# Altium PCB Power_Board_DRV8323.PcbDoc
Units mil, origin at the board's own origin, x right, y up, seen from the top; angles counter-clockwise.
Board outline 6000 x 4000 mil, 2 copper layers (Top Layer, Bottom Layer); 41 components, 45 nets, 170 pads, 22 vias.
Unrouted connection lines stored in the file: 33.
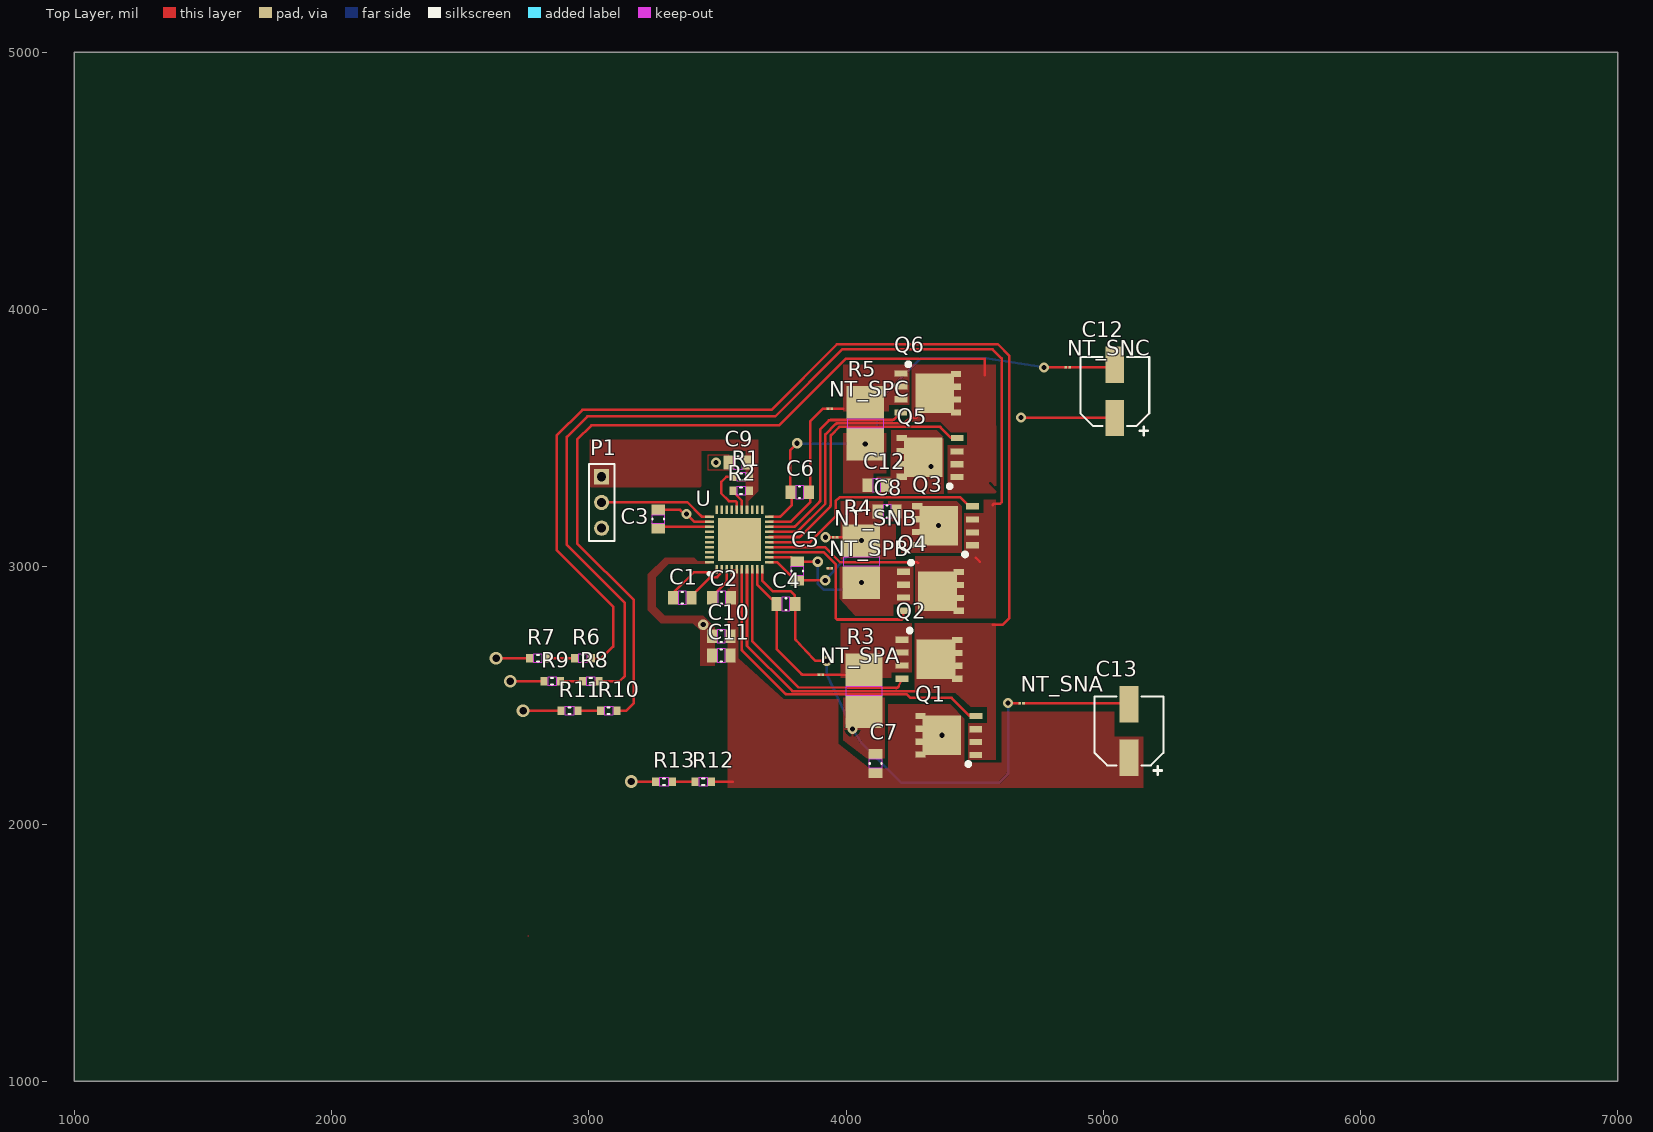
[diagram p0: Top Layer view]
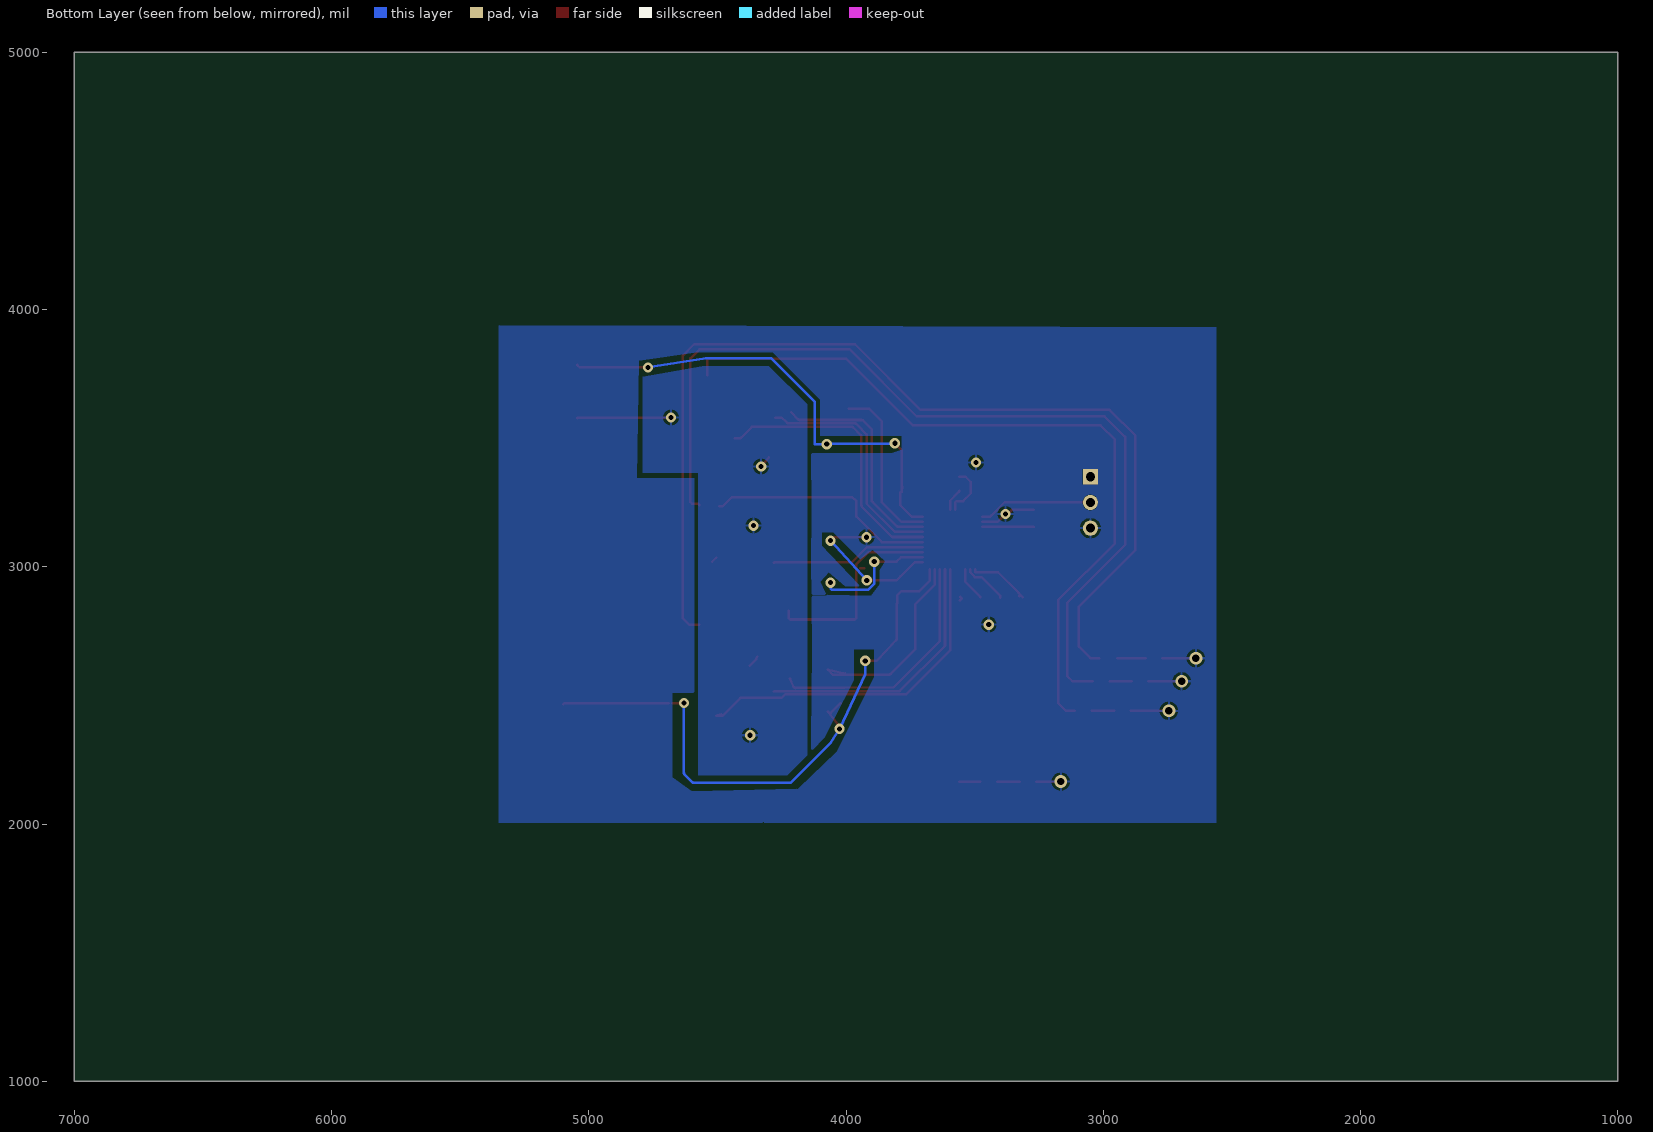
[diagram p1: Bottom Layer view, seen from below]
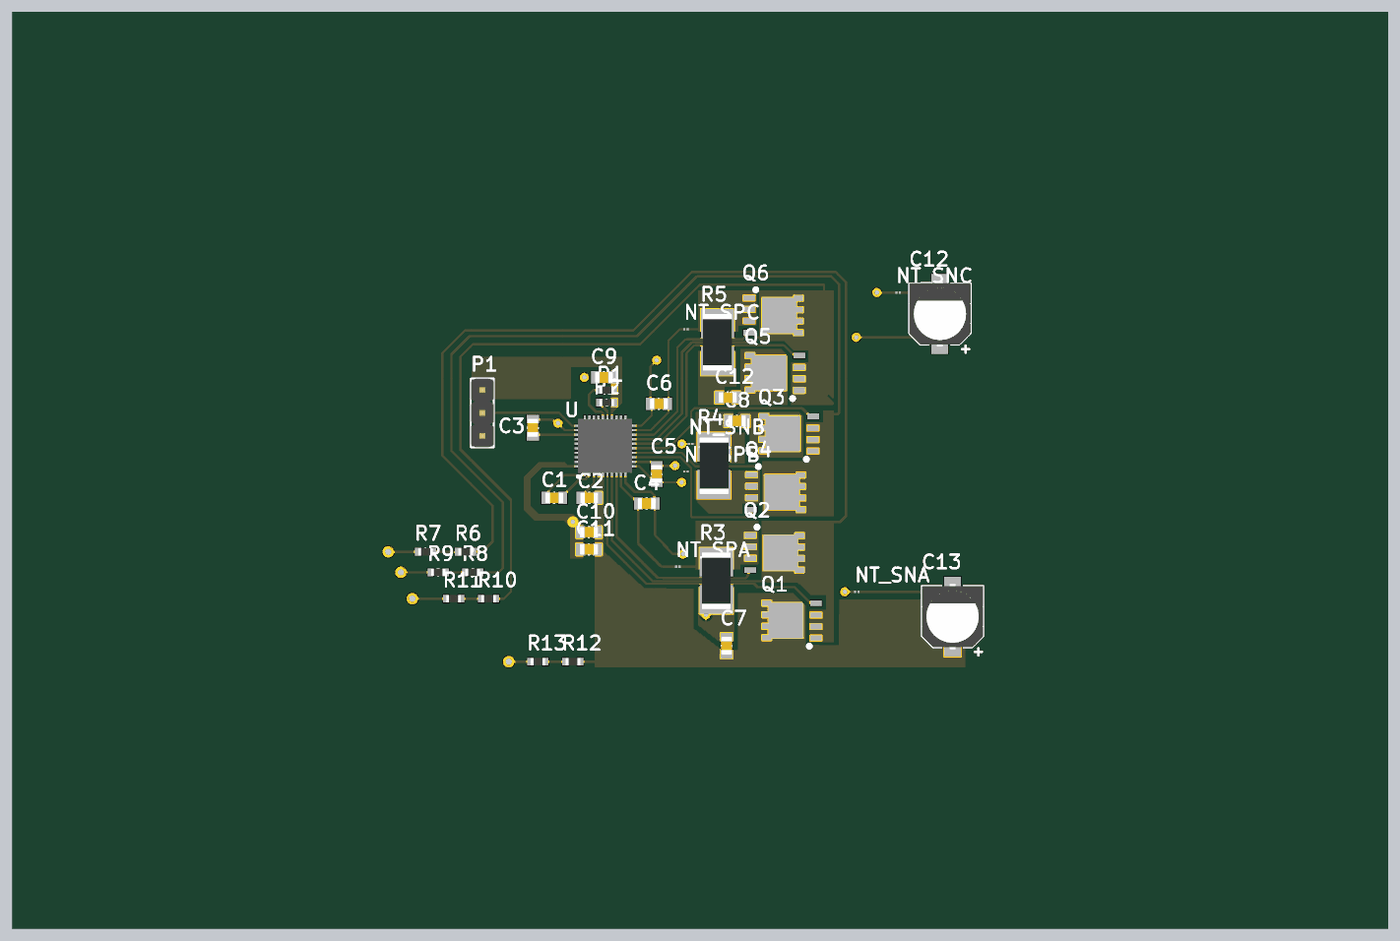
[diagram p2: 3D render of the assembled board from above, using the file's embedded part models]

## Layer stack, top to bottom
Top Solder: solder mask 0.4, Solder Resist, Dk 3.5
Top Layer: signal copper 1.4
Dielectric 1: dielectric 12.6, FR-4, Dk 4.8
Bottom Layer: signal copper 1.4
Bottom Solder: solder mask 0.4, Solder Resist, Dk 3.5

## Board outline
1000,1000 7000,1000 7000,5000 1000,5000

## Design rules (kind name [scope] priority, off if disabled: settings)
Clearance [All] p1 off: gap=10 ignorepadtopadclearanceinfootprint=FALSE except(0: Arc-Hole Track-Hole SMDPad-Hole THPad-Hole Via-Hole Fill-Hole Poly-Hole Region-Hole Text-Hole)
PolygonConnect PolygonConnect_48 [All vs IsNamedPolygon('GND_L01_P007')] p1: thpad.connectstyle=Direct thpad.reliefconductorwidth=10 thpad.reliefentries=4 thpad.polygonreliefangle="90 Angle" thpad.airgapwidth=10 smdpad.connectstyle=Direct smdpad.reliefconductorwidth=10 smdpad.reliefentries=4 smdpad.polygonreliefangle="90 Angle" smdpad.airgapwidth=10 via.connectstyle=Relief via.reliefconductorwidth=10 via.reliefentries=4 via.polygonreliefangle="90 Angle" via.airgapwidth=10
PolygonConnect PolygonConnect_47 [All vs IsNamedPolygon('GND_L01_P007')] p2: thpad.connectstyle=Direct thpad.reliefconductorwidth=10 thpad.reliefentries=4 thpad.polygonreliefangle="90 Angle" thpad.airgapwidth=10 smdpad.connectstyle=Direct smdpad.reliefconductorwidth=10 smdpad.reliefentries=4 smdpad.polygonreliefangle="90 Angle" smdpad.airgapwidth=10 via.connectstyle=Relief via.reliefconductorwidth=10 via.reliefentries=4 via.polygonreliefangle="90 Angle" via.airgapwidth=10
PolygonConnect PolygonConnect_46 [All vs IsNamedPolygon('GND_L01_P007')] p3: thpad.connectstyle=Direct thpad.reliefconductorwidth=10 thpad.reliefentries=4 thpad.polygonreliefangle="90 Angle" thpad.airgapwidth=10 smdpad.connectstyle=Direct smdpad.reliefconductorwidth=10 smdpad.reliefentries=4 smdpad.polygonreliefangle="90 Angle" smdpad.airgapwidth=10 via.connectstyle=Relief via.reliefconductorwidth=10 via.reliefentries=4 via.polygonreliefangle="90 Angle" via.airgapwidth=10
PolygonConnect PolygonConnect_45 [All vs IsNamedPolygon('GND_L01_P007')] p4: thpad.connectstyle=Direct thpad.reliefconductorwidth=10 thpad.reliefentries=4 thpad.polygonreliefangle="90 Angle" thpad.airgapwidth=10 smdpad.connectstyle=Direct smdpad.reliefconductorwidth=10 smdpad.reliefentries=4 smdpad.polygonreliefangle="90 Angle" smdpad.airgapwidth=10 via.connectstyle=Relief via.reliefconductorwidth=10 via.reliefentries=4 via.polygonreliefangle="90 Angle" via.airgapwidth=10
PolygonConnect PolygonConnect_44 [All vs IsNamedPolygon('VBATT_L02_P041')] p5: thpad.connectstyle=Direct thpad.reliefconductorwidth=10 thpad.reliefentries=4 thpad.polygonreliefangle="90 Angle" thpad.airgapwidth=10 smdpad.connectstyle=Direct smdpad.reliefconductorwidth=10 smdpad.reliefentries=4 smdpad.polygonreliefangle="90 Angle" smdpad.airgapwidth=10 via.connectstyle=Relief via.reliefconductorwidth=10 via.reliefentries=4 via.polygonreliefangle="90 Angle" via.airgapwidth=10
PolygonConnect PolygonConnect_43 [All vs IsNamedPolygon('VBATT_L02_P041')] p6: thpad.connectstyle=Direct thpad.reliefconductorwidth=10 thpad.reliefentries=4 thpad.polygonreliefangle="90 Angle" thpad.airgapwidth=10 smdpad.connectstyle=Direct smdpad.reliefconductorwidth=10 smdpad.reliefentries=4 smdpad.polygonreliefangle="90 Angle" smdpad.airgapwidth=10 via.connectstyle=Relief via.reliefconductorwidth=10 via.reliefentries=4 via.polygonreliefangle="90 Angle" via.airgapwidth=10
PolygonConnect PolygonConnect_42 [All vs IsNamedPolygon('GND_L01_P045')] p7: thpad.connectstyle=Direct thpad.reliefconductorwidth=10 thpad.reliefentries=4 thpad.polygonreliefangle="90 Angle" thpad.airgapwidth=10 smdpad.connectstyle=Direct smdpad.reliefconductorwidth=10 smdpad.reliefentries=4 smdpad.polygonreliefangle="90 Angle" smdpad.airgapwidth=10 via.connectstyle=Relief via.reliefconductorwidth=10 via.reliefentries=4 via.polygonreliefangle="90 Angle" via.airgapwidth=10
PolygonConnect PolygonConnect_41 [All vs IsNamedPolygon('SNA_L01_P039')] p8: thpad.connectstyle=Direct thpad.reliefconductorwidth=10 thpad.reliefentries=4 thpad.polygonreliefangle="90 Angle" thpad.airgapwidth=10 smdpad.connectstyle=Direct smdpad.reliefconductorwidth=10 smdpad.reliefentries=4 smdpad.polygonreliefangle="90 Angle" smdpad.airgapwidth=10 via.connectstyle=Relief via.reliefconductorwidth=10 via.reliefentries=4 via.polygonreliefangle="90 Angle" via.airgapwidth=10
PolygonConnect PolygonConnect_40 [All vs IsNamedPolygon('SNA_L01_P039')] p9: thpad.connectstyle=Direct thpad.reliefconductorwidth=10 thpad.reliefentries=4 thpad.polygonreliefangle="90 Angle" thpad.airgapwidth=10 smdpad.connectstyle=Direct smdpad.reliefconductorwidth=10 smdpad.reliefentries=4 smdpad.polygonreliefangle="90 Angle" smdpad.airgapwidth=10 via.connectstyle=Relief via.reliefconductorwidth=10 via.reliefentries=4 via.polygonreliefangle="90 Angle" via.airgapwidth=10
PolygonConnect PolygonConnect_39 [All vs IsNamedPolygon('SNA_L01_P039')] p10: thpad.connectstyle=Direct thpad.reliefconductorwidth=10 thpad.reliefentries=4 thpad.polygonreliefangle="90 Angle" thpad.airgapwidth=10 smdpad.connectstyle=Direct smdpad.reliefconductorwidth=10 smdpad.reliefentries=4 smdpad.polygonreliefangle="90 Angle" smdpad.airgapwidth=10 via.connectstyle=Relief via.reliefconductorwidth=10 via.reliefentries=4 via.polygonreliefangle="90 Angle" via.airgapwidth=10
PolygonConnect PolygonConnect_38 [All vs IsNamedPolygon('SNA_L01_P039')] p11: thpad.connectstyle=Direct thpad.reliefconductorwidth=10 thpad.reliefentries=4 thpad.polygonreliefangle="90 Angle" thpad.airgapwidth=10 smdpad.connectstyle=Direct smdpad.reliefconductorwidth=10 smdpad.reliefentries=4 smdpad.polygonreliefangle="90 Angle" smdpad.airgapwidth=10 via.connectstyle=Relief via.reliefconductorwidth=10 via.reliefentries=4 via.polygonreliefangle="90 Angle" via.airgapwidth=10
PolygonConnect PolygonConnect_37 [All vs IsNamedPolygon('VBATT_L02_P041')] p12: thpad.connectstyle=Direct thpad.reliefconductorwidth=10 thpad.reliefentries=4 thpad.polygonreliefangle="90 Angle" thpad.airgapwidth=10 smdpad.connectstyle=Direct smdpad.reliefconductorwidth=10 smdpad.reliefentries=4 smdpad.polygonreliefangle="90 Angle" smdpad.airgapwidth=10 via.connectstyle=Relief via.reliefconductorwidth=10 via.reliefentries=4 via.polygonreliefangle="90 Angle" via.airgapwidth=10
PolygonConnect PolygonConnect_36 [All vs IsNamedPolygon('GND_L01_P007')] p13: thpad.connectstyle=Direct thpad.reliefconductorwidth=10 thpad.reliefentries=4 thpad.polygonreliefangle="90 Angle" thpad.airgapwidth=10 smdpad.connectstyle=Direct smdpad.reliefconductorwidth=10 smdpad.reliefentries=4 smdpad.polygonreliefangle="90 Angle" smdpad.airgapwidth=10 via.connectstyle=Relief via.reliefconductorwidth=10 via.reliefentries=4 via.polygonreliefangle="90 Angle" via.airgapwidth=10
PolygonConnect PolygonConnect_35 [All vs IsNamedPolygon('GND_L01_P007')] p14: thpad.connectstyle=Direct thpad.reliefconductorwidth=10 thpad.reliefentries=4 thpad.polygonreliefangle="90 Angle" thpad.airgapwidth=10 smdpad.connectstyle=Direct smdpad.reliefconductorwidth=10 smdpad.reliefentries=4 smdpad.polygonreliefangle="90 Angle" smdpad.airgapwidth=10 via.connectstyle=Relief via.reliefconductorwidth=10 via.reliefentries=4 via.polygonreliefangle="90 Angle" via.airgapwidth=10
PolygonConnect PolygonConnect_34 [All vs IsNamedPolygon('VBATT_L02_P041')] p15: thpad.connectstyle=Direct thpad.reliefconductorwidth=10 thpad.reliefentries=4 thpad.polygonreliefangle="90 Angle" thpad.airgapwidth=10 smdpad.connectstyle=Direct smdpad.reliefconductorwidth=10 smdpad.reliefentries=4 smdpad.polygonreliefangle="90 Angle" smdpad.airgapwidth=10 via.connectstyle=Relief via.reliefconductorwidth=10 via.reliefentries=4 via.polygonreliefangle="90 Angle" via.airgapwidth=10
PolygonConnect PolygonConnect_33 [All vs IsNamedPolygon('VBATT_L02_P041')] p16: thpad.connectstyle=Direct thpad.reliefconductorwidth=10 thpad.reliefentries=4 thpad.polygonreliefangle="90 Angle" thpad.airgapwidth=10 smdpad.connectstyle=Direct smdpad.reliefconductorwidth=10 smdpad.reliefentries=4 smdpad.polygonreliefangle="90 Angle" smdpad.airgapwidth=10 via.connectstyle=Relief via.reliefconductorwidth=10 via.reliefentries=4 via.polygonreliefangle="90 Angle" via.airgapwidth=10
PolygonConnect PolygonConnect_32 [All vs IsNamedPolygon('VBATT_L02_P041')] p17: thpad.connectstyle=Direct thpad.reliefconductorwidth=10 thpad.reliefentries=4 thpad.polygonreliefangle="90 Angle" thpad.airgapwidth=10 smdpad.connectstyle=Direct smdpad.reliefconductorwidth=10 smdpad.reliefentries=4 smdpad.polygonreliefangle="90 Angle" smdpad.airgapwidth=10 via.connectstyle=Relief via.reliefconductorwidth=10 via.reliefentries=4 via.polygonreliefangle="90 Angle" via.airgapwidth=10
PolygonConnect PolygonConnect_31 [All vs IsNamedPolygon('VBATT_L02_P041')] p18: thpad.connectstyle=Direct thpad.reliefconductorwidth=10 thpad.reliefentries=4 thpad.polygonreliefangle="90 Angle" thpad.airgapwidth=10 smdpad.connectstyle=Direct smdpad.reliefconductorwidth=10 smdpad.reliefentries=4 smdpad.polygonreliefangle="90 Angle" smdpad.airgapwidth=10 via.connectstyle=Relief via.reliefconductorwidth=10 via.reliefentries=4 via.polygonreliefangle="90 Angle" via.airgapwidth=10
PolygonConnect PolygonConnect_30 [All vs IsNamedPolygon('GND_L01_P042')] p19: thpad.connectstyle=Direct thpad.reliefconductorwidth=10 thpad.reliefentries=4 thpad.polygonreliefangle="90 Angle" thpad.airgapwidth=10 smdpad.connectstyle=Direct smdpad.reliefconductorwidth=10 smdpad.reliefentries=4 smdpad.polygonreliefangle="90 Angle" smdpad.airgapwidth=10 via.connectstyle=Relief via.reliefconductorwidth=10 via.reliefentries=4 via.polygonreliefangle="90 Angle" via.airgapwidth=10
PolygonConnect PolygonConnect_29 [All vs IsNamedPolygon('NETNT_SPB_2_L01_P026')] p20: thpad.connectstyle=Direct thpad.reliefconductorwidth=10 thpad.reliefentries=4 thpad.polygonreliefangle="90 Angle" thpad.airgapwidth=10 smdpad.connectstyle=Direct smdpad.reliefconductorwidth=10 smdpad.reliefentries=4 smdpad.polygonreliefangle="90 Angle" smdpad.airgapwidth=10 via.connectstyle=Relief via.reliefconductorwidth=10 via.reliefentries=4 via.polygonreliefangle="90 Angle" via.airgapwidth=10
PolygonConnect PolygonConnect_28 [All vs IsNamedPolygon('NETNT_SPA_2_L01_P029')] p21: thpad.connectstyle=Direct thpad.reliefconductorwidth=10 thpad.reliefentries=4 thpad.polygonreliefangle="90 Angle" thpad.airgapwidth=10 smdpad.connectstyle=Direct smdpad.reliefconductorwidth=10 smdpad.reliefentries=4 smdpad.polygonreliefangle="90 Angle" smdpad.airgapwidth=10 via.connectstyle=Relief via.reliefconductorwidth=10 via.reliefentries=4 via.polygonreliefangle="90 Angle" via.airgapwidth=10
PolygonConnect PolygonConnect_27 [All vs IsNamedPolygon('SNC_L01_P015')] p22: thpad.connectstyle=Direct thpad.reliefconductorwidth=10 thpad.reliefentries=4 thpad.polygonreliefangle="90 Angle" thpad.airgapwidth=10 smdpad.connectstyle=Direct smdpad.reliefconductorwidth=10 smdpad.reliefentries=4 smdpad.polygonreliefangle="90 Angle" smdpad.airgapwidth=10 via.connectstyle=Relief via.reliefconductorwidth=10 via.reliefentries=4 via.polygonreliefangle="90 Angle" via.airgapwidth=10
PolygonConnect PolygonConnect_26 [All vs IsNamedPolygon('SNB_L01_P024')] p23: thpad.connectstyle=Direct thpad.reliefconductorwidth=10 thpad.reliefentries=4 thpad.polygonreliefangle="90 Angle" thpad.airgapwidth=10 smdpad.connectstyle=Direct smdpad.reliefconductorwidth=10 smdpad.reliefentries=4 smdpad.polygonreliefangle="90 Angle" smdpad.airgapwidth=10 via.connectstyle=Relief via.reliefconductorwidth=10 via.reliefentries=4 via.polygonreliefangle="90 Angle" via.airgapwidth=10
PolygonConnect PolygonConnect_25 [All vs IsNamedPolygon('SNA_L01_P041')] p24: thpad.connectstyle=Direct thpad.reliefconductorwidth=10 thpad.reliefentries=4 thpad.polygonreliefangle="90 Angle" thpad.airgapwidth=10 smdpad.connectstyle=Direct smdpad.reliefconductorwidth=10 smdpad.reliefentries=4 smdpad.polygonreliefangle="90 Angle" smdpad.airgapwidth=10 via.connectstyle=Relief via.reliefconductorwidth=10 via.reliefentries=4 via.polygonreliefangle="90 Angle" via.airgapwidth=10
PolygonConnect PolygonConnect_24 [All vs IsNamedPolygon('VBATT_L01_P023')] p25: thpad.connectstyle=Direct thpad.reliefconductorwidth=10 thpad.reliefentries=4 thpad.polygonreliefangle="90 Angle" thpad.airgapwidth=10 smdpad.connectstyle=Direct smdpad.reliefconductorwidth=10 smdpad.reliefentries=4 smdpad.polygonreliefangle="90 Angle" smdpad.airgapwidth=10 via.connectstyle=Relief via.reliefconductorwidth=10 via.reliefentries=4 via.polygonreliefangle="90 Angle" via.airgapwidth=10
PolygonConnect PolygonConnect_23 [All vs IsNamedPolygon('Top Layer-VBATT')] p26: thpad.connectstyle=Direct thpad.reliefconductorwidth=10 thpad.reliefentries=4 thpad.polygonreliefangle="90 Angle" thpad.airgapwidth=10 smdpad.connectstyle=Direct smdpad.reliefconductorwidth=10 smdpad.reliefentries=4 smdpad.polygonreliefangle="90 Angle" smdpad.airgapwidth=10 via.connectstyle=Relief via.reliefconductorwidth=10 via.reliefentries=4 via.polygonreliefangle="90 Angle" via.airgapwidth=10
PolygonConnect PolygonConnect_22 [All vs IsNamedPolygon('PHASE_A_L01_P030')] p27: thpad.connectstyle=Direct thpad.reliefconductorwidth=10 thpad.reliefentries=4 thpad.polygonreliefangle="90 Angle" thpad.airgapwidth=10 smdpad.connectstyle=Direct smdpad.reliefconductorwidth=10 smdpad.reliefentries=4 smdpad.polygonreliefangle="90 Angle" smdpad.airgapwidth=10 via.connectstyle=Relief via.reliefconductorwidth=10 via.reliefentries=4 via.polygonreliefangle="90 Angle" via.airgapwidth=10
PolygonConnect PolygonConnect_21 [All vs IsNamedPolygon('PHASE_A_L01_P030')] p28: thpad.connectstyle=Direct thpad.reliefconductorwidth=10 thpad.reliefentries=4 thpad.polygonreliefangle="90 Angle" thpad.airgapwidth=10 smdpad.connectstyle=Direct smdpad.reliefconductorwidth=10 smdpad.reliefentries=4 smdpad.polygonreliefangle="90 Angle" smdpad.airgapwidth=10 via.connectstyle=Relief via.reliefconductorwidth=10 via.reliefentries=4 via.polygonreliefangle="90 Angle" via.airgapwidth=10
PolygonConnect PolygonConnect_20 [All vs IsNamedPolygon('PHASE_A_L01_P030')] p29: thpad.connectstyle=Direct thpad.reliefconductorwidth=10 thpad.reliefentries=4 thpad.polygonreliefangle="90 Angle" thpad.airgapwidth=10 smdpad.connectstyle=Direct smdpad.reliefconductorwidth=10 smdpad.reliefentries=4 smdpad.polygonreliefangle="90 Angle" smdpad.airgapwidth=10 via.connectstyle=Relief via.reliefconductorwidth=10 via.reliefentries=4 via.polygonreliefangle="90 Angle" via.airgapwidth=10
PolygonConnect PolygonConnect_19 [All vs IsNamedPolygon('SNA_L01_P039')] p30: thpad.connectstyle=Direct thpad.reliefconductorwidth=10 thpad.reliefentries=4 thpad.polygonreliefangle="90 Angle" thpad.airgapwidth=10 smdpad.connectstyle=Direct smdpad.reliefconductorwidth=10 smdpad.reliefentries=4 smdpad.polygonreliefangle="90 Angle" smdpad.airgapwidth=10 via.connectstyle=Relief via.reliefconductorwidth=10 via.reliefentries=4 via.polygonreliefangle="90 Angle" via.airgapwidth=10
PolygonConnect PolygonConnect_18 [All vs IsNamedPolygon('PHASE_B_L01_P018')] p31: thpad.connectstyle=Direct thpad.reliefconductorwidth=10 thpad.reliefentries=4 thpad.polygonreliefangle="90 Angle" thpad.airgapwidth=10 smdpad.connectstyle=Direct smdpad.reliefconductorwidth=10 smdpad.reliefentries=4 smdpad.polygonreliefangle="90 Angle" smdpad.airgapwidth=10 via.connectstyle=Relief via.reliefconductorwidth=10 via.reliefentries=4 via.polygonreliefangle="90 Angle" via.airgapwidth=10
PolygonConnect PolygonConnect_17 [All vs IsNamedPolygon('PHASE_A_L01_P030')] p32: thpad.connectstyle=Direct thpad.reliefconductorwidth=10 thpad.reliefentries=4 thpad.polygonreliefangle="90 Angle" thpad.airgapwidth=10 smdpad.connectstyle=Direct smdpad.reliefconductorwidth=10 smdpad.reliefentries=4 smdpad.polygonreliefangle="90 Angle" smdpad.airgapwidth=10 via.connectstyle=Relief via.reliefconductorwidth=10 via.reliefentries=4 via.polygonreliefangle="90 Angle" via.airgapwidth=10
PolygonConnect PolygonConnect_16 [All vs IsNamedPolygon('SPB_L01_P035')] p33: thpad.connectstyle=Direct thpad.reliefconductorwidth=10 thpad.reliefentries=4 thpad.polygonreliefangle="90 Angle" thpad.airgapwidth=10 smdpad.connectstyle=Direct smdpad.reliefconductorwidth=10 smdpad.reliefentries=4 smdpad.polygonreliefangle="90 Angle" smdpad.airgapwidth=10 via.connectstyle=Relief via.reliefconductorwidth=10 via.reliefentries=4 via.polygonreliefangle="90 Angle" via.airgapwidth=10
PolygonConnect PolygonConnect_15 [All vs IsNamedPolygon('NETNT_SPC_2_L01_P014')] p34: thpad.connectstyle=Direct thpad.reliefconductorwidth=10 thpad.reliefentries=4 thpad.polygonreliefangle="90 Angle" thpad.airgapwidth=10 smdpad.connectstyle=Direct smdpad.reliefconductorwidth=10 smdpad.reliefentries=4 smdpad.polygonreliefangle="90 Angle" smdpad.airgapwidth=10 via.connectstyle=Relief via.reliefconductorwidth=10 via.reliefentries=4 via.polygonreliefangle="90 Angle" via.airgapwidth=10
PolygonConnect PolygonConnect_14 [All vs IsNamedPolygon('PHASE_C_L01_P008')] p35: thpad.connectstyle=Direct thpad.reliefconductorwidth=10 thpad.reliefentries=4 thpad.polygonreliefangle="90 Angle" thpad.airgapwidth=10 smdpad.connectstyle=Direct smdpad.reliefconductorwidth=10 smdpad.reliefentries=4 smdpad.polygonreliefangle="90 Angle" smdpad.airgapwidth=10 via.connectstyle=Relief via.reliefconductorwidth=10 via.reliefentries=4 via.polygonreliefangle="90 Angle" via.airgapwidth=10
PolygonConnect PolygonConnect_13 [All vs IsNamedPolygon('GND_L01_P007')] p36: thpad.connectstyle=Direct thpad.reliefconductorwidth=10 thpad.reliefentries=4 thpad.polygonreliefangle="90 Angle" thpad.airgapwidth=10 smdpad.connectstyle=Direct smdpad.reliefconductorwidth=10 smdpad.reliefentries=4 smdpad.polygonreliefangle="90 Angle" smdpad.airgapwidth=10 via.connectstyle=Relief via.reliefconductorwidth=10 via.reliefentries=4 via.polygonreliefangle="90 Angle" via.airgapwidth=10
PolygonConnect PolygonConnect_12 [All vs IsNamedPolygon('GND_L01_P007')] p37: thpad.connectstyle=Direct thpad.reliefconductorwidth=10 thpad.reliefentries=4 thpad.polygonreliefangle="90 Angle" thpad.airgapwidth=10 smdpad.connectstyle=Direct smdpad.reliefconductorwidth=10 smdpad.reliefentries=4 smdpad.polygonreliefangle="90 Angle" smdpad.airgapwidth=10 via.connectstyle=Relief via.reliefconductorwidth=10 via.reliefentries=4 via.polygonreliefangle="90 Angle" via.airgapwidth=10
PolygonConnect PolygonConnect_11 [All vs IsNamedPolygon('GND_L01_P007')] p38: thpad.connectstyle=Direct thpad.reliefconductorwidth=10 thpad.reliefentries=4 thpad.polygonreliefangle="90 Angle" thpad.airgapwidth=10 smdpad.connectstyle=Direct smdpad.reliefconductorwidth=10 smdpad.reliefentries=4 smdpad.polygonreliefangle="90 Angle" smdpad.airgapwidth=10 via.connectstyle=Relief via.reliefconductorwidth=10 via.reliefentries=4 via.polygonreliefangle="90 Angle" via.airgapwidth=10
PolygonConnect PolygonConnect_10 [All vs IsNamedPolygon('3V3_L01_P005')] p39: thpad.connectstyle=Direct thpad.reliefconductorwidth=10 thpad.reliefentries=4 thpad.polygonreliefangle="90 Angle" thpad.airgapwidth=10 smdpad.connectstyle=Direct smdpad.reliefconductorwidth=10 smdpad.reliefentries=4 smdpad.polygonreliefangle="90 Angle" smdpad.airgapwidth=10 via.connectstyle=Relief via.reliefconductorwidth=10 via.reliefentries=4 via.polygonreliefangle="90 Angle" via.airgapwidth=10
PolygonConnect PolygonConnect_9 [All vs IsNamedPolygon('3V3_L01_P005')] p40: thpad.connectstyle=Direct thpad.reliefconductorwidth=10 thpad.reliefentries=4 thpad.polygonreliefangle="90 Angle" thpad.airgapwidth=10 smdpad.connectstyle=Direct smdpad.reliefconductorwidth=10 smdpad.reliefentries=4 smdpad.polygonreliefangle="90 Angle" smdpad.airgapwidth=10 via.connectstyle=Relief via.reliefconductorwidth=10 via.reliefentries=4 via.polygonreliefangle="90 Angle" via.airgapwidth=10
PolygonConnect PolygonConnect_8 [All vs IsNamedPolygon('3V3_L01_P005')] p41: thpad.connectstyle=Relief thpad.reliefconductorwidth=10 thpad.reliefentries=4 thpad.polygonreliefangle="90 Angle" thpad.airgapwidth=10 smdpad.connectstyle=Direct smdpad.reliefconductorwidth=10 smdpad.reliefentries=4 smdpad.polygonreliefangle="90 Angle" smdpad.airgapwidth=10 via.connectstyle=Relief via.reliefconductorwidth=10 via.reliefentries=4 via.polygonreliefangle="90 Angle" via.airgapwidth=10
PolygonConnect PolygonConnect_7 [All vs IsNamedPolygon('GND_L01_P007')] p42: thpad.connectstyle=Direct thpad.reliefconductorwidth=10 thpad.reliefentries=4 thpad.polygonreliefangle="90 Angle" thpad.airgapwidth=10 smdpad.connectstyle=Direct smdpad.reliefconductorwidth=10 smdpad.reliefentries=4 smdpad.polygonreliefangle="90 Angle" smdpad.airgapwidth=10 via.connectstyle=Relief via.reliefconductorwidth=10 via.reliefentries=4 via.polygonreliefangle="90 Angle" via.airgapwidth=10
PolygonConnect PolygonConnect_6 [All vs IsNamedPolygon('GND_L01_P007')] p43: thpad.connectstyle=Relief thpad.reliefconductorwidth=10 thpad.reliefentries=4 thpad.polygonreliefangle="90 Angle" thpad.airgapwidth=10 smdpad.connectstyle=Direct smdpad.reliefconductorwidth=10 smdpad.reliefentries=4 smdpad.polygonreliefangle="90 Angle" smdpad.airgapwidth=10 via.connectstyle=Relief via.reliefconductorwidth=10 via.reliefentries=4 via.polygonreliefangle="90 Angle" via.airgapwidth=10
PolygonConnect PolygonConnect_5 [All vs IsNamedPolygon('GND_L01_P007')] p44: thpad.connectstyle=Relief thpad.reliefconductorwidth=10 thpad.reliefentries=4 thpad.polygonreliefangle="90 Angle" thpad.airgapwidth=10 smdpad.connectstyle=Direct smdpad.reliefconductorwidth=10 smdpad.reliefentries=4 smdpad.polygonreliefangle="90 Angle" smdpad.airgapwidth=10 via.connectstyle=Relief via.reliefconductorwidth=10 via.reliefentries=4 via.polygonreliefangle="90 Angle" via.airgapwidth=10
PolygonConnect PolygonConnect_4 [All vs IsNamedPolygon('3V3_L01_P005')] p45: thpad.connectstyle=Relief thpad.reliefconductorwidth=10 thpad.reliefentries=4 thpad.polygonreliefangle="90 Angle" thpad.airgapwidth=10 smdpad.connectstyle=Direct smdpad.reliefconductorwidth=10 smdpad.reliefentries=4 smdpad.polygonreliefangle="90 Angle" smdpad.airgapwidth=10 via.connectstyle=Relief via.reliefconductorwidth=10 via.reliefentries=4 via.polygonreliefangle="90 Angle" via.airgapwidth=10
PolygonConnect PolygonConnect_3 [All vs IsNamedPolygon('3V3_L01_P005')] p46: thpad.connectstyle=Relief thpad.reliefconductorwidth=10 thpad.reliefentries=4 thpad.polygonreliefangle="90 Angle" thpad.airgapwidth=10 smdpad.connectstyle=Direct smdpad.reliefconductorwidth=10 smdpad.reliefentries=4 smdpad.polygonreliefangle="90 Angle" smdpad.airgapwidth=10 via.connectstyle=Relief via.reliefconductorwidth=10 via.reliefentries=4 via.polygonreliefangle="90 Angle" via.airgapwidth=10
PolygonConnect PolygonConnect_2 [All vs IsNamedPolygon('3V3_L01_P005')] p47: thpad.connectstyle=Relief thpad.reliefconductorwidth=10 thpad.reliefentries=4 thpad.polygonreliefangle="90 Angle" thpad.airgapwidth=10 smdpad.connectstyle=Direct smdpad.reliefconductorwidth=10 smdpad.reliefentries=4 smdpad.polygonreliefangle="90 Angle" smdpad.airgapwidth=10 via.connectstyle=Relief via.reliefconductorwidth=10 via.reliefentries=4 via.polygonreliefangle="90 Angle" via.airgapwidth=10
PolygonConnect PolygonConnect_1 [All vs IsNamedPolygon('VBATT_L01_P000')] p48: thpad.connectstyle=Relief thpad.reliefconductorwidth=10 thpad.reliefentries=4 thpad.polygonreliefangle="90 Angle" thpad.airgapwidth=10 smdpad.connectstyle=Direct smdpad.reliefconductorwidth=10 smdpad.reliefentries=4 smdpad.polygonreliefangle="90 Angle" smdpad.airgapwidth=10 via.connectstyle=Relief via.reliefconductorwidth=10 via.reliefentries=4 via.polygonreliefangle="90 Angle" via.airgapwidth=10
PolygonConnect [All] p49: connectstyle=Relief reliefconductorwidth=10 reliefentries=4 polygonreliefangle="90 Angle" airgapwidth=10
RoutingVias [All] p1: holewidth=28 width=50 viastyle="Through Hole" minholewidth=28 minwidth=50 maxholewidth=28 maxwidth=50
SolderMaskExpansion [All] p1: expansion=4 istentingtop=FALSE
Width [All] p1: maxlimit=50 minlimit=10 preferedwidth=10 minimp=50.000000 maximp=50.000000 favimp=50.000000
30 further rules are at their usual default settings.

## Components (designator, comment, footprint, x,y, rotation, side; value= is the part's Value field where it differs from the comment)
C1 "Capacitor - Nonpolarized" "0805 - CAPACITOR" 3363.41,2880 r180 top value=47nF
C2 "Capacitor - Nonpolarized" "0805 - CAPACITOR" 3516.42,2880 r0 top value=1uF
C3 "Capacitor - Nonpolarized" "0805 - CAPACITOR" 3270,3185 r270 top value=1uF
C4 "Capacitor - Nonpolarized" "0805 - CAPACITOR" 3766.42,2855 r180 top value=1nF
C5 "Capacitor - Nonpolarized" "0805 - CAPACITOR" 3810,2983.58 r90 top value=1nF
C6 "Capacitor - Nonpolarized" "0805 - CAPACITOR" 3820,3290 r0 top value=1nF
C7 "Capacitor - Nonpolarized" "0805 - CAPACITOR" 4115,2235 r90 top value=10uF
C8 "Capacitor - Nonpolarized" "0805 - CAPACITOR" 4160,3215 r0 top value=10uF
C9 "Capacitor - Nonpolarized" "0805 - CAPACITOR" 3580,3405 r180 top value=0.1uF
C10 "Capacitor - Nonpolarized" "0805 - CAPACITOR" 3515,2730 r180 top value=10uF
C11 "Capacitor - Nonpolarized" "0805 - CAPACITOR" 3515,2655 r180 top value=0.1uF
C12 "Capacitor - Nonpolarized" "0805 - CAPACITOR" 4120,3317.4 r0 top value=10uF
C12 "Capacitor - Polarized" "OCVZ0606 - CAPACITOR" 5045,3681.65 r90 top value=330uF
C13 "Capacitor - Polarized" "OCVZ0606 - CAPACITOR" 5100,2361.65 r90 top value=330uF
NT_SNA "NetTie" "NET TIE"#1 4675,2470 r90 top net-tie
NT_SNB "NetTie" "NET TIE"#2 3965,3115 r270 top net-tie
NT_SNC "NetTie" "NET TIE"#2 4855,3775 r90 top net-tie
NT_SPA "NetTie" "NET TIE"#2 3895,2580 r90 top net-tie
NT_SPB "NetTie" "NET TIE"#2 3930,2995 r90 top net-tie
NT_SPC "NetTie" "NET TIE"#2 3930,3615 r90 top net-tie
P1 "1x3 Header" HDR1X3 3050,3350 r270 top
Q1 "MOSFET-N" "POWERPAK® SO-8" 4505,2420 r180 top
Q2 "MOSFET-N" "POWERPAK® SO-8" 4217.72,2565 r0 top
Q3 "MOSFET-N" "POWERPAK® SO-8" 4492.28,3235 r180 top
Q4 "MOSFET-N" "POWERPAK® SO-8" 4223.36,2829.05 r0 top
Q5 "MOSFET-N" "POWERPAK® SO-8" 4432.28,3500 r180 top
Q6 "MOSFET-N" "POWERPAK® SO-8" 4212.72,3600 r0 top
R1 "Resistor" "0603 - RESISTOR" 3592.48,3350 r0 top value=4.7k
R2 "Resistor" "0603 - RESISTOR" 3592.52,3295 r0 top value=4.7k
R3 "Resistor" "2512 - RESISTOR" 4070,2518.31 r90 top value=1m
R4 "Resistor" "2512 - RESISTOR" 4060,3020 r270 top value=1m
R5 "Resistor" "2512 - RESISTOR" 4075,3558.31 r90 top value=1m
R6 "Resistor" "0603 - RESISTOR" 2977.28,2644.25 r180 top value=91k
R7 "Resistor" "0603 - RESISTOR" 2802.28,2644.25 r180 top value=5.6k
R8 "Resistor" "0603 - RESISTOR" 3007.72,2555 r180 top value=91k
R9 "Resistor" "0603 - RESISTOR" 2857.72,2555 r180 top value=5.6k
R10 "Resistor" "0603 - RESISTOR" 3077.52,2440 r180 top value=91k
R11 "Resistor" "0603 - RESISTOR" 2925.04,2440 r180 top value=5.6k
R12 "Resistor" "0603 - RESISTOR" 3445,2165 r180 top value=91k
R13 "Resistor" "0603 - RESISTOR" 3292.52,2165 r180 top value=5.6k
U "DRV8323SRTAT" DRV8323SRTAT 3585.55,3105.79 r90 top

## Footprints (in the part's own frame and the unit in brackets; to place one, negate y for a bottom-side part, rotate by r counter-clockwise, add the part's x,y. Pads: shape width x height; smd on the part's side, far side on the other; paste and mask are expansions set on the pad)
"0603 - RESISTOR" [mm] "0603 Chip Resistor - IPC Medium Density"
  rect 0.7x0.85 smd: 1(-0.825,0) 2(0.825,0)
  Top Layer keep-out region: -0.45,0.4 -0.45,-0.4 0.45,-0.4 0.45,0.4
  silkscreen extent -0.1,-0.33 0.1,0.33, body extent -0.8,-0.4 0.8,0.4, height 0.45
"0805 - CAPACITOR" [mm] "0805 Chip Capacitor - IPC Medium Density"
  rect 1x1.35 smd: 1(-0.925,0) 2(0.925,0)
  Top Layer keep-out region: -0.4,0.65 -0.4,-0.65 0.4,-0.65 0.4,0.65
  silkscreen extent -0.05,-0.58 0.05,0.58, body extent -1,-0.6 1,0.6, height 1.2
"2512 - RESISTOR" [mm]
  rect 3.2x3.7 smd: 1(-2.075,0) 2(2.075,0)
  Top Layer keep-out region: -0.45,1.8 -0.45,-1.8 0.4,-1.8 0.4,1.8
  body extent -3.15,-1.6 3.15,1.6, height 0.6
DRV8323SRTAT [mm]
  rect 0.85x0.25 smd: 1(-2.95,2.25) 2(-2.95,1.75) 3(-2.95,1.25) 4(-2.95,0.75) 5(-2.95,0.25) 6(-2.95,-0.25) 7(-2.95,-0.75) 8(-2.95,-1.25) 9(-2.95,-1.75) 10(-2.95,-2.25) 21(2.95,-2.25) 22(2.95,-1.75) 23(2.95,-1.25) 24(2.95,-0.75) 25(2.95,-0.25) 26(2.95,0.25) 27(2.95,0.75) 28(2.95,1.25) 29(2.95,1.75) 30(2.95,2.25)
  rect 0.25x0.85 smd: 11(-2.25,-2.95) 12(-1.75,-2.95) 13(-1.25,-2.95) 14(-0.75,-2.95) 15(-0.25,-2.95) 16(0.25,-2.95) 17(0.75,-2.95) 18(1.25,-2.95) 19(1.75,-2.95) 20(2.25,-2.95) 31(2.25,2.95) 32(1.75,2.95) 33(1.25,2.95) 34(0.75,2.95) 35(0.25,2.95) 36(-0.25,2.95) 37(-0.75,2.95) 38(-1.25,2.95) 39(-1.75,2.95) 40(-2.25,2.95)
  rect 4.25x4.25 smd: 41(0,0)
  silkscreen extent -3.5,2.87 -3.25,3.12, body extent -3.05,-3.05 3.05,3.05, height 0.8
HDR1X3 [mm] "Connector; Header; 3 Position"
  rect 1.5x1.5 hole 0.9: 1(0,0)
  round 1.5 hole 0.9: 2(2.54,0) 3(5.08,0)
  silkscreen extent -1.27,-1.27 6.35,1.27, body extent -1.27,-1.27 6.35,1.27, height 8.54
"NET TIE"#1 [mil] "General Net TIe"
  rect 10x10 smd mask+0: 1(0,0) 2(0,-15)
"NET TIE"#2 [mil] "General Net TIe"
  rect 10x10 smd mask+0: 1(0,0) 2(0,-15)
  Top Layer lines w10: 0,-15 0,0
"OCVZ0606 - CAPACITOR" [mm] "Aluminum Electrolytic Capacitor, Body 6.60x6.60x6.00mm, IPC Low Density"
  rect 3.6x1.85 smd: 1(-2.625,0) 2(2.625,0)
  silkscreen extent -4.3,-3.4 3.4,3.4, body extent -3.6,-3.4 3.6,3.4, height 6
"POWERPAK® SO-8" [mm]
  rect 1.27x0.61 smd: 1(0,0) 3(0.017,3.845) 3(0.017,2.575) 3(0.017,1.305)
  rect 3.81x3.91 smd: 2(3.36,1.905)
  rect 1.02x0.61 smd: 2(5.465,3.81) 2(5.465,0) 2(5.465,0) 2(5.465,1.27) 2(5.465,2.54)
  silkscreen extent 0.57,4.57 0.93,4.93

## Part data
C1 C2 C7 C8 C10 C11 C12: "Nonpolarized Capacitor", Rating=100V
C3 C4 C5 C6 C9: "Nonpolarized Capacitor"
C12 C13: "Polarized Capacitor", Rating=100V
NT_SNA NT_SNB NT_SNC NT_SPA NT_SPB NT_SPC: library part "Net Tie"
P1: "1x3 Pin Header"
Q1 Q2 Q3 Q4 Q5 Q6: "N-Channel MOSFET", Rating=100V, Supplier Part Number=SiR846DP
R3 R4 R5: Manufacturer=HCS2512FT1L00, Rating=3W, Supplier Part Number=HCS2512FT1L00CT-ND, Tolerance=1%
R7 R9 R11 R13: Tolerance=1%
U: "Multiphase Motor Driver Power MOSFET SPI", Manufacturer="Texas Instruments", Supplier Part Number=296-47095-1-ND, ComponentLink1Description=Datasheet, ComponentLink1URL=https://www.ti.com/lit/ds/symlink/drv8323.pdf?HQS=dis-dk-null-digikeymode-dsf-pf-null-wwe&ts=1623708117864, Manufacturer Part Number=DRV8323SRTAT, Supplier=Digikey

## Via types
v1: diameter 40, hole 20, Top Layer to Bottom Layer, 18 vias
v2: diameter 50, hole 28, Top Layer to Bottom Layer, 4 vias

## Nets (pads, with @x,y where several pads share a name; then routed paths per layer and width w, separated by ;. In a path a pad name is that pad's centre, name@x,y a point inside that pad or via, vN(x,y) a via of type N, cw(c..) or ccw(c..) an arc to the next point about the centre after c; other vN are vias at no path point)
3V3: C9.1 P1.1 R1.2 R2.2 U.24
CAL: P1.2 U.31 | length 442.7
  Top Layer w10: P1.2 cw(c3054.8,3241.23) 3054.76,3251.23 3382.91,3251.23 3436.88,3197.26 ccw(c3443.91,3204.37) 3443.87,3194.37 U.31
CS_DRIVER: U.29
DVDD: C3.2 U.33 | length 200.7
  Top Layer w10: C3.2@3270,3155 C3.2@3270.47,3155 ; C3.2@3270,3155.47 C3.2@3270.47,3155 ; U.33@3470,3155 U.33 C3.2@3270.47,3155
EN: U.30
GHA: Q1.1 U.6 | length 1329.6
  Top Layer w10: U.6 3595.39,2725.39 3595,2725 3595,2679.08 ccw(c3605,2679.14) 3597.88,2672.12 3762.1,2507.9 ccw(c3769.14,2515) 3769.14,2505 4235,2505 4250,2490 4410,2490 4480,2420 Q1.1
GHB: Q3.1 U.15 | length 912.3
  Top Layer w10: U.15 3860.94,3095.94 3960,3195 3960,3255 3975,3270 4444.29,3270 4479.29,3235 Q3.1
GHC: Q5.1 U.16 | length 1085.4
  Top Layer w10: U.16 3816.49,3115.63 ccw(c3816.49,3125.63) 3823.54,3118.54 3937.07,3232.07 ccw(c3930,3239.14) 3940,3239.14 3940,3505.86 cw(c3950,3505.86) 3942.93,3512.93 3971.81,3541.81 cw(c3978.88,3534.74) 3978.88,3544.74 4361.12,3544.74 cw(c4361.12,3534.74) 4368.19,3541.81 4407.12,3502.88 ccw(c4414.14,3510) 4414.08,3500 Q5.1
GLA: Q2.1 U.8 | length 958
  Top Layer w10: U.8 3634.76,2711.28 3815.18,2530.87 4194.9,2528.74 ccw(c4194.91,2538.74) 4204.03,2534.63 Q2.1
GLB: Q4.1 U.13 | length 783.2
  Top Layer w10: U.13 3913.43,3056.57 3960,3010 3960,2800.86 3965.86,2795 4217.51,2795 4223.36,2800.86 Q4.1
GLC: Q6.1 U.18 | length 857.6
  Top Layer w10: U.18 3795.86,3155 ccw(c3795.86,3165) 3802.91,3157.91 3897.11,3252.11 ccw(c3890,3259.14) 3900,3259.14 3900,3535 3932.54,3567.54 cw(c3939.61,3560.46) 3939.61,3570.46 4179.04,3570.46 ccw(c4179.04,3580.46) 4186.11,3573.39 Q6.1
GND: C3.1 C9.2 C10.2 C11.2 C12.2@5045,3785 C13.2 NT_SNA.2 NT_SNB.2 NT_SNC.2 NT_SPB.2 P1.3 R7.2 R9.2 R11.2 R13.2 U.32 U.40 U.41 | length 1342.6
  Top Layer w10: v2(2640,2644.25) R7.2 ; v2(2695,2555) R9.2 ; v2(2745.04,2440) R11.2 ; v2(3165,2165) R13.2 ; C3.1 3355.46,3221.42 3371.88,3205 v1(3380,3205) 3410.32,3174.68 U.32 ; v1(3920,3115) NT_SNB.2 ; NT_SNA.2 5095,2470 C13.2 ; NT_SNC.2 5035,3775 C12.2@5045,3785
  other v1: 3445,2775 3495,3405
INHA: U.34
INHB: U.36
INHC: U.38
INLA: U.35
INLB: U.37
INLC: U.39
NetC1_1: C1.1 U.2 | length 173.1
  Top Layer w10: C1.1 3399.83,2886.89 3472.94,2960 3498.66,2960 3516.65,2977.99 U.2
NetC1_2: C1.2 U.1 | length 238.2
  Top Layer w10: C1.2@3312.74,2881.22 C1.2@3328.1,2896.57 ; C1.2@3324.92,2886.22 C1.2@3326.32,2886.22 ; C1.2@3328.27,2896.57 3328.27,2897.98 3408.91,2978.63 3496.85,2978.63 3496.97,2978.75 U.1@3496.97,2990.24
NetC2_1: C2.1 U.3 | length 132.1
  Top Layer w10: C2.1@3477.5,2882.5 3536.34,2941.34 U.3 U.3@3536.34,2990.24
NetNT_SPA_2: NT_SPA.2 Q2.3 R3.2 | length 237.8
  Top Layer w10: NT_SPA.2 4050,2580 R3.2 R3.2@4002.17,2585
NetNT_SPB_2: Q4.3 R4.2
  other v1: 4060,2938.31
NetNT_SPC_2: NT_SPC.2 Q6.3 R5.2 | length 45
  Top Layer w10: NT_SPC.2 3990,3615
NFAULT: R2.1 U.25 | length 87.7
  Top Layer w10: R2.1 3560.04,3292.05 3595.39,3256.69 U.25
PHASE_A: Q1.3 Q2.2 R6.1 U.7 | length 5133.8
  Top Layer w10: R6.1@3015,2645 3050,2645 3095,2690 3095,2845 2875,3065 2875,3510 2975,3610 3710,3610 3965,3865 4590,3865 4635,3820 4635,2800 4610,2775 4570,2775 ; U.7 3615.08,2692.71 3791.4,2516.4 4278.37,2516.4 4279.77,2515 ; Q2.2@4345,2650 4350,2640 Q2.2@4375,2615 ; 4485,2427.01 4505,2420
PHASE_B: Q3.3 Q4.2 R8.1 U.14 | length 4200.6
  Top Layer w10: R8.1 3105.43,2555 ; 3105,2555 3120,2555 3140,2575 3140,2860 2915,3085 2915,3505 2995,3585 3725,3585 3985,3845 4570,3845 4605,3810 4605,3250.86 4599.14,3245 4575,3245 4570,3240 ; U.14 3918.74,3076.26 3977.5,3017.5 4277.5,3017.5 4280,3015 ; 4505,3035 4520,3020
PHASE_C: Q5.3 Q6.2 R10.1 U.17 | length 3887.6
  Top Layer w10: R10.1 3145,2440 3175,2470 3175,2870 2955,3090 2955,3495 3010,3550 3740,3550 3999.14,3809.14 4540,3809.14 4540,3745 ; U.17 3810.32,3135.32 3920,3245 3920,3515 3959.4,3554.4 cw(c3966.47,3547.33) 3966.47,3557.33 4223.19,3557.33 ccw(c4223.19,3567.33) 4230.26,3560.26 4250,3580 4275,3580
SCLK: U.28
SDI: U.27
SDO: R1.1 U.26 | length 201.1
  Top Layer w10: R1.1 3535,3350 3515,3330 3515,3285 3545,3255 3569.85,3255 3575.71,3249.14 U.26
SNA: C4.1 C7.2 NT_SNA.1 R3.1 U.10 | length 1925
  Top Layer w10: U.10 3674.13,2945.87 3715,2905 3785,2905 3800,2890 3800,2857.83 C4.1 3802.83,2721.17 ccw(c3812.83,2721.23) 3805.5,2714.43 3875.26,2640.24 3879.59,2635.63 v1(3924.98,2634.23) ; v1(4025,2370) 4025,2378.62 R3.1 ; v1(4630,2470) NT_SNA.1
  Bottom Layer w10: v1(3924.98,2634.23) 3924.98,2582.63 v1(4025,2370) 4060.16,2314.84 4212.07,2162.93 ccw(c4219.14,2170) 4219.14,2160 4590.86,2160 ccw(c4590.86,2170) 4597.91,2162.91 4627.11,2192.11 ccw(c4620,2199.14) 4630,2199.14 v1(4630,2470)
SNB: C5.1 C8.1 NT_SNB.1 R4.1 U.11 | length 556.4
  Top Layer w10: U.11 3733.43,3017.2 3788.43,2962.2 3788.43,2961.85 3803.11,2947.17 C5.1 3872.48,2947.17 v1(3919.14,2947.03) ; NT_SNB.1 4046.69,3115 v1(4060,3101.69)
  Bottom Layer w10: v1(3919.14,2947.03) v1(4060,3101.69)
SNC: C6.1 C12.1@4083.58,3317.4 NT_SNC.1 R5.1 U.20 | length 1653.8
  Top Layer w10: U.20 3740.23,3194.37 ccw(c3740.23,3204.37) 3747.28,3197.28 3788.58,3238.58 C6.1@3788.58,3290 ; C6.1@3782.02,3312.75 ccw(c3791.73,3310.36) 3781.77,3309.45 C6.1 3783.58,3453.58 v1(3810,3480) ; v1(4770,3775) NT_SNC.1
  Bottom Layer w10: v1@3820,3480 3821.69,3478.31 4073.31,3478.31 v1(4075,3476.61) 4121.61,3476.61 4121.61,3641.61 4290,3810 4544.23,3810 v1(4770,3775)
SOA: U.23
SOB: U.22
SOC: U.21
SPA: C4.2 NT_SPA.1 U.9 | length 546.9
  Top Layer w10: U.9 3654.45,2930.55 C4.2 3730,2680 3827.07,2582.93 ccw(c3834.14,2590) 3834.14,2580 NT_SPA.1
SPB: C5.2 NT_SPB.1 U.12 | length 485.5
  Top Layer w10: U.12 3786.22,3036.89 3803.11,3020 C5.2 v1(3890,3020)
  Bottom Layer w10: v1(3890,3020) 3890,2935 3915,2910 4054.14,2910 4060,2915.86 4060,2938.31
SPC: C6.2 NT_SPC.1 U.19 | length 594.8
  Top Layer w10: U.19 3780.54,3174.68 ccw(c3780.54,3184.68) 3787.6,3177.6 3861.42,3251.42 3861.42,3395 3861.42,3455 3861.42,3566.42 3910,3615 NT_SPC.1
VBATT: C2.2 C7.1 C8.2 C10.1 C11.1 C12.1@5045,3578.31 C12.2@4156.42,3317.4 C13.1 Q1.2 Q3.2 Q5.2 R12.1 U.4 U.5 | length 512.2
  Top Layer w10: R12.1 3560,2165 ; C2.2@3556.02,2882.7 3550.03,2876.7 C2.2@3557.15,2869.57 ; Q5.2@4300,3425 v1(4330,3390) ; v1(4680,3580) 5013.58,3580 C12.1@5045,3578.31
  other v1: 4372.72,2345 4360,3160
VSENSE_A: R6.2 R7.1 | length 110
  Top Layer w10: R7.1 R6.2
VSENSE_B: R8.2 R9.1 | length 85
  Top Layer w10: R9.1 R8.2
VSENSE_C: R10.2 R11.1 | length 87.5
  Top Layer w10: R11.1 R10.2
VSENSE_VBATT: R12.2 R13.1 | length 87.5
  Top Layer w10: R13.1 R12.2
copper on no net: | length 54.9
  Top Layer w10: 4021.36,2470 4060.16,2431.2

## Polygon pours and split planes (outlines as drawn)
VBATT on Top Layer "Top Layer-VBATT" (solid, pour order 40): 3540,2140 4460,2140 5154.74,2140 5154.74,2340 5043,2340 5043,2435.87 4605.5,2435.87 4604.52,2237.52 4460,2238.65 4460,2410 4405,2465 4165,2465 4165,2215 4095.16,2215 3970,2311.04 3970,2484.79 3757.28,2485.11 3580.62,2645 3580.62,2989.65 3551.18,2989.65 3550,2915 3540,2915 3540,2609.48
3V3 on Top Layer "3V3_L01_P005" (solid, pour order 5): 3619.16,3207.98 3610.84,3207.98 3610.84,3450.11 3436.8,3450.11 3436.8,3309.98 3129.01,3310.03 3004.2,3309.98 3004.2,3494.34 3610.84,3494.34 3659.4,3494.34 3659.4,3294.4 3619.16,3254.16
GND on Top Layer "GND_L01_P007" (solid, pour order 7): 3545.14,3375.07 3465,3374.94 3465,3435 3545.14,3435 3545.14,3411.09
PHASE_A on Top Layer "PHASE_A_L01_P030" (solid, pour order 30): 4267.34,2780.97 4583.21,2780.97 4582.41,2780.17 4582.41,2250 4475,2250 4475,2391.24 4548.76,2391.24 4548.65,2454.96 4485,2455 4425,2510 4267.34,2510 4267.34,2527.53
SNA on Top Layer "SNA_L01_P039" (solid, pour order 39): 4150,2490 4150,2255 4080,2255 3990,2325 3990,2490
no net on Top Layer "Top Layer-No Net" (solid, pour order 16): 4146.08,3284.81 4380,3284.81 4380,3503.7 4353.7,3530 4175.43,3530 4174.39,3350 4120,3350 4120,3284.81 4127.4,3284.81 4130,3284.81 4140,3284.81
PHASE_C on Top Layer "PHASE_C_L01_P008" (solid, pour order 8): 4256.45,3784.66 4256.45,3578.25 4256.45,3564.09 4365.91,3564.09 4406.95,3523.05 4470.47,3523.05 4470.47,3472.09 4396.45,3472.09 4396.45,3285.24 4583.54,3285.24 4582.71,3785.5 4583.54,3784.66
GND on Top Layer "GND_L01_P042" (solid, pour order 42): 3469.15,3012.44 3469.15,3022.11 3422.89,3022.11 3410,3035 3295,3035 3230,2970 3230,2830 3280,2780 3405,2780 3432.52,2752.48 3432.52,2615 3490,2615 3490,2765 3445,2810 3295,2810 3260,2845 3260,2960 3310,3012.44
NetNT_SPB_2 on Top Layer "NETNT_SPB_2_L01_P026" (solid, pour order 26): 4260.95,3000 4260.95,2855 4182.91,2855 4182.91,2809.93 4036.68,2809.93 3975,2875.66 3975,3000
NetNT_SPC_2 on Top Layer "NETNT_SPC_2_L01_P014" (solid, pour order 14): 4166.24,3605 4166.24,3623.76 4166.24,3630 4245,3630 4245,3785 3990,3785 3990,3605
NetNT_SPA_2 on Top Layer "NETNT_SPA_2_L01_P029" (solid, pour order 29): 4255,2780 3980,2780 3980,2633.24 3980,2600 3980,2568.55 4175,2568.55 4175,2590 4255,2590
SNB on Top Layer "SNB_L01_P024" (solid, pour order 24): 4047.81,3255 4145,3255 4145,3239.2 4145,3165 4194.28,3165 4194.28,3030 3980,3030 3980,3255
VBATT on Top Layer "VBATT_L01_P023" (solid, pour order 23): 4165,3255 4430,3255 4450,3235 4450,3055 4215,3055 4215,3176.8 4165,3176.8 4165,3245
PHASE_B on Top Layer "PHASE_B_L01_P018" (solid, pour order 18): 4535,3260.85 4582.95,3260.85 4582.95,2800 4270,2800 4270,3040 4460,3040 4460,3208.21 4535,3208.21
SNC on Top Layer "SNC_L01_P015" (solid, pour order 15): 3990,3520 4157.12,3520 4157.12,3363.14 4107.96,3363.14 4106.86,3363.14 4105.82,3363.14 4105.82,3285.12 3990,3285.12
SPB on Top Layer "SPB_L01_P035" (solid, pour order 35): 2765,1565 2765,1563.69
GND on Bottom Layer "GND_L02_P046" (solid, pour order 46): 4324.67,2005 4035.62,2280.39 3890,2572.9 3890,2678.8 3969.16,2678.8 3969.16,2558.54 4084.07,2334.78 4134.39,2284.46 4134.55,2335.31 4131.05,2672.38 4133.39,2891.87 3901.4,2887.43 3869.48,2932.7 3869.48,2986.32 3847.4,3021.65 3896.61,3067.07 3945,3030 4049.73,3134.73 4095.03,3133.91 4094.96,3080.99 4060.65,3046.67 3945,2924.05 4002.99,2924.56 4066.38,2979.53 4100.06,2940.9 4076.25,2887.43 4133.29,2887.43 4135.9,3005.53 4133.39,3218.39 4133.47,3235.62 4134.55,3441.33 3825,3441.33 3782.94,3454.6 3782.94,3509.26 4100.06,3509.26 4100.06,3649.72 4285.21,3834.88 4577.19,3834.37 4804.76,3801.85 4814.26,3345 4590,3345 4590,2509.81 4675,2510.14 4675,2180.81 4599.94,2126.92 4185.17,2137.91 4324.67,2005 5350,2005 5350,3939.8 4387.04,3936.7 2560,3930.81 2560,2005
VBATT on Bottom Layer "VBATT_L02_P041" (solid, pour order 41): 4300.25,3780 4151.11,3632.72 4151.11,2267.61 4228.72,2190 4575,2190 4575,3364.59 4790,3364.59 4790,3739.12 4558.33,3780